# Altium PCB Morpheus_LED.PcbDoc (part 2 of 2)
Units mm, origin at the board's own origin, x right, y up, seen from the top; angles counter-clockwise.
Board outline 53.02 x 53.02 mm, 4 copper layers (Component Side, Ground Plane, Power Plane, Solder Side), stack 0.108 mm thick; 57 components, 33 nets, 170 pads, 69 vias.
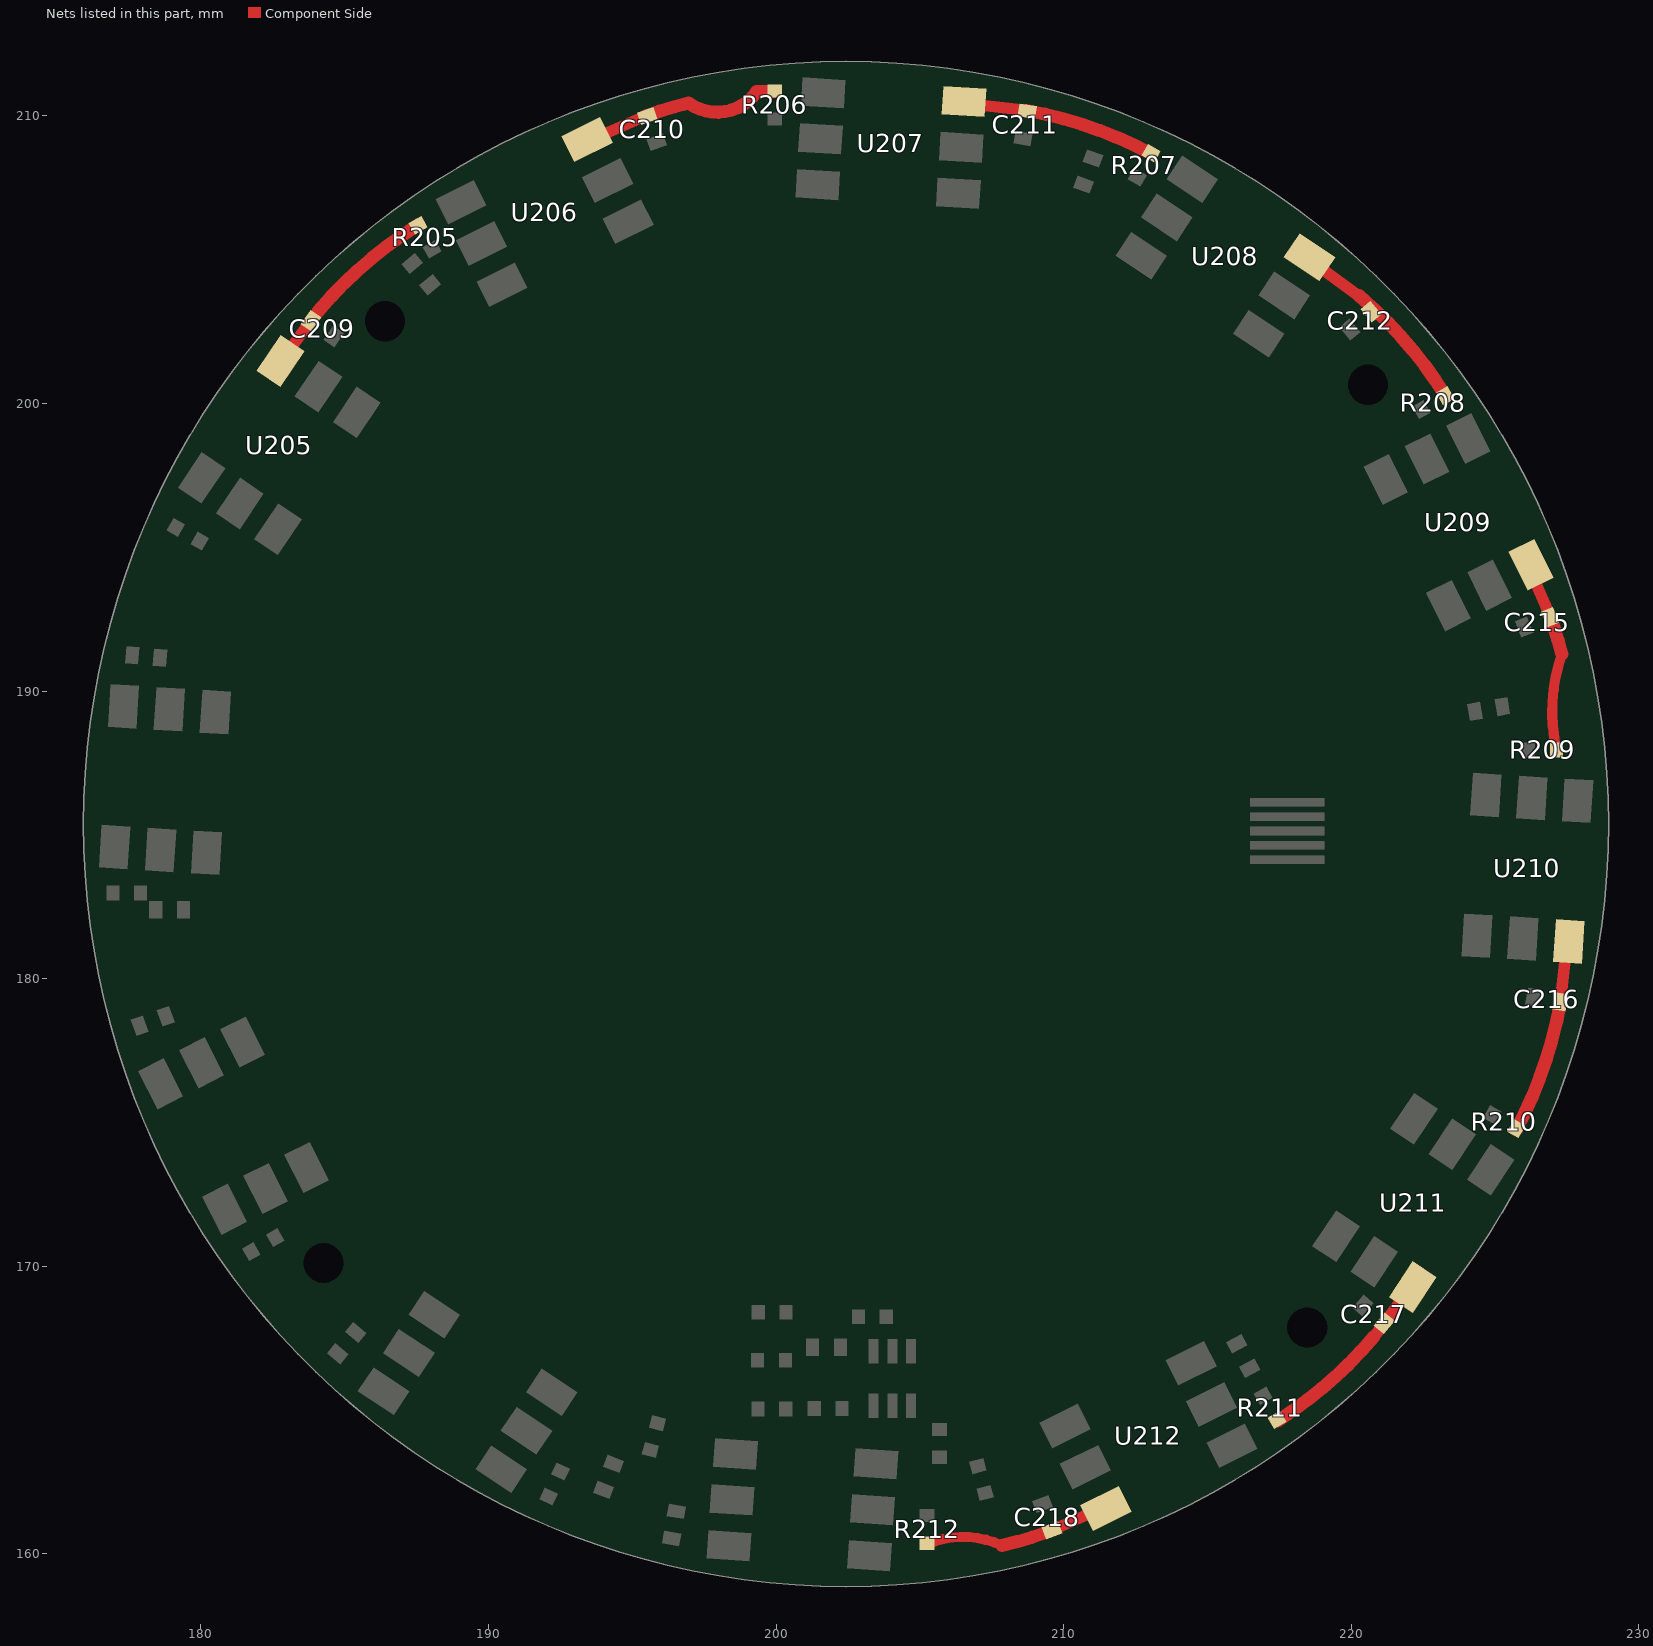
[diagram p4: the nets of this part, all layers, seen from the top]

## Via types
v1: diameter 0.6, hole 0.3, Component Side to Solder Side, tented both sides, 36 vias
v2: diameter 0.87, hole 0.411, Component Side to Solder Side, tented both sides, 28 vias
v3: diameter 0.6, hole 0.4, Component Side to Solder Side, tented both sides, 5 vias

## Nets (pads, with @x,y where several pads share a name; then routed paths per layer and width w, separated by ;. In a path a pad name is that pad's centre, name@x,y a point inside that pad or via, vN(x,y) a via of type N, cw(c..) or ccw(c..) an arc to the next point about the centre after c; other vN are vias at no path point) (continued)
VCC_205: C209.2 R205.1 U205.3 | length 6.8
  Component Side w0.4: U205.3@182.785,201.463 184.049,203.175
  Component Side w0.454: 184.068,203.196 cw(c195.471,193.515) R205.1@187.577,206.221
VCC_206: C210.2 R206.1 U206.3 | length 7
  Component Side w0.4: U206.3@193.456,209.121 C210.2@195.434,209.983
  Component Side w0.454: C210.2@195.461,209.993 cw(c200.496,195.907) 196.963,210.443 ccw(c197.953,211.815) 199.325,210.825 ; 199.324,210.846 cw(c199.701,195.892) R206.1@199.932,210.849
VCC_207: C211.2 R207.1 U207.3 | length 6.8
  Component Side w0.4: U207.3@206.529,210.437 C211.2@208.672,210.196
  Component Side w0.454: C211.2@208.7,210.19 cw(c206.018,195.474) R207.1@213.074,208.664
VCC_208: C212.2 R208.1 U208.3 | length 6.4
  Component Side w0.4: U208.3@218.879,204.756 220.323,203.69
  Component Side w0.454: 220.27,203.746 cw(c210.589,192.342) R208.1@223.295,200.237
VCC_209: C215.2 R209.1 U209.3 | length 6.1
  Component Side w0.354: R209.1@227.133,187.95 cw(c233.189,189.278) 227.324,191.287
  Component Side w0.4: U209.3@226.369,193.869 C215.2@226.905,192.64
  Component Side w0.454: C215.2@226.915,192.613 cw(c212.829,187.578) 227.321,191.286
VCC_210: C216.2 R210.1 U210.3 | length 7
  Component Side w0.4: C216.2@227.271,179.16 U210.3@227.531,181.466
  Component Side w0.454: R210.1@225.739,174.758 ccw(c212.549,181.814) C216.2@227.266,179.132
VCC_211: C217.2 R211.1 U211.3 | length 6.6
  Component Side w0.4: 220.815,167.577 U211.3@222.093,169.307
  Component Side w0.454: R211.1@217.437,164.625 ccw(c209.392,177.236) 220.796,167.555
VCC_212: C218.2 R212.1 U212.3 | length 6.5
  Component Side w0.354: R212.1@205.253,160.336 cw(c206.5,157.379) 207.854,160.289
  Component Side w0.4: C218.2@209.473,160.77 U212.3@211.444,161.63
  Component Side w0.454: 207.854,160.289 ccw(c204.41,174.847) C218.2@209.446,160.761
pads on no net: H101.1 H102.1 H103.1 H104.1 U201.4 U202.4 U203.4 U204.4 U205.4 U206.4 U207.4 U208.4 U209.4 U210.4 U211.4 U212.4

## Polygon pours and split planes (outlines as drawn)
GND on Ground Plane "Power Plane-No Net" (solid, pour order 2): 175.94,185.373 ccw(c202.44,185.373) 202.44,158.873 ccw(c202.44,185.373) 228.94,185.373 ccw(c202.44,185.373) 202.44,211.873 ccw(c202.44,185.373)
no net on Keep-Out Layer "Power Plane-No Net" (none): 175.94,185.373 ccw(c202.44,185.373) 202.44,158.873 ccw(c202.44,185.373) 228.94,185.373 ccw(c202.44,185.373) 202.44,211.873 ccw(c202.44,185.373)
5V on Power Plane "Power Plane-No Net" (solid, pour order 5): 175.94,185.373 ccw(c202.44,185.373) 202.44,158.873 ccw(c202.44,185.373) 228.94,185.373 ccw(c202.44,185.373) 202.44,211.873 ccw(c202.44,185.373)
no net on Multi-Layer (none): 193.195,166.644 ccw(c202.432,185.376) 197.181,165.161 ccw(c197.432,166.128) 198.432,166.128 198.432,175.119 cw(c200.432,175.119) 199.018,176.533 209.525,187.04 cw(c210.939,185.626) 210.939,187.626 215.74,187.626 cw(c215.74,187.126) 216.24,187.126 ccw(c216.74,187.126) 216.74,186.626 219.19,186.626 219.19,183.626 216.74,183.626 ccw(c216.74,183.126) 216.24,183.126 cw(c215.74,183.126) 215.74,182.626 215.741,182.626 213.011,182.626 213.01,182.626 ccw(c213.01,180.626) 211.596,182.04 207.018,177.462 ccw(c208.432,176.048) 206.432,176.048 206.432,166.128 ccw(c207.432,166.128) 207.684,165.161 ccw(c202.432,185.376) 211.67,166.644 ccw(c202.432,185.376) 214.036,168.01 ccw(c202.432,185.376) 218.549,198.661 219.431,199.466 ccw(c219.026,199.91) 219.478,200.305 ccw(c202.432,185.376) 218.784,201.062 ccw(c218.351,200.647) 217.946,201.09 217.062,200.283 ccw(c202.432,185.376) 214.036,202.742 ccw(c202.432,185.376) 211.67,204.108 ccw(c202.432,185.376) 193.195,204.108 ccw(c202.432,185.376) 190.829,202.742 ccw(c202.432,185.376) 181.761,182.388 180.588,182.155 ccw(c180.705,181.567) 180.114,181.463 ccw(c202.432,185.376) 180.314,180.456 ccw(c180.9,180.586) 181.017,179.998 182.19,180.231 ccw(c202.432,185.376)
no net on Flex-stiffener part "Mechanical 10-No Net" (solid): 175.95,185.423 ccw(c202.462,185.423) 202.462,158.911 ccw(c202.462,185.423) 228.974,185.423 ccw(c202.462,185.423) 202.462,211.935 ccw(c202.462,185.423)

## Keep-outs
Assemble drawing:
  circle w0.13: c202.44,185.373 r26.5
  circle w0.13: c184.274,170.124 r0.7
  circle w0.13: c218.474,167.874 r0.7
  circle w0.13: c186.408,202.854 r0.7
  lines w0.13: 217.43,171.587 217.835,171.587 218.638,171.587
Drill Drawing:
  circle w0.13: c184.274,170.124 r0.7
  circle w0.13: c218.474,167.874 r0.7
  circle w0.13: c186.408,202.854 r0.7

## Other copper
Component Side:
  text "Component side" at 341.804,234.529 h1.52
Ground Plane:
  pour cut-out: 197.176,165.139 ccw(c197.432,166.128) 198.454,166.128 198.454,169.066 201.669,169.066 ccw(c201.669,169.132) 201.735,169.132 ccw(c201.669,169.132) 201.727,169.162 201.727,175.575 ccw(c201.706,175.582) 201.728,175.582 cw(c203.706,175.582) 202.301,176.974 ccw(c202.288,176.992) 202.304,176.977 210.577,185.25 ccw(c210.567,185.269) 210.583,185.254 cw(c211.981,183.855) 211.981,185.833 ccw(c211.981,185.855) 211.989,185.835 214.683,185.835 214.683,185.788 ccw(c214.69,185.788) 214.697,185.788 214.697,185.835 214.702,185.835 ccw(c214.702,185.856) 214.724,185.856 ccw(c214.702,185.856) 214.702,185.878 214.697,185.878 214.697,187.604 215.739,187.604 ccw(c215.74,187.626) 215.74,187.604 cw(c215.74,187.126) 216.218,187.126 ccw(c216.24,187.126) 216.218,187.126 ccw(c216.74,187.126) 216.739,186.604 ccw(c216.741,187.125) 216.74,186.604 219.168,186.604 219.168,183.648 216.74,183.648 cw(c216.74,183.626) 216.741,183.648 216.74,183.648 ccw(c216.74,183.126) 216.218,183.126 ccw(c216.24,183.126) 216.218,183.125 ccw(c215.741,183.126) 216.218,183.126 216.218,183.125 cw(c215.74,183.126) 215.741,182.648 cw(c215.74,183.126) 215.74,182.648 215.741,182.648 cw(c215.741,182.626) 215.741,182.648 214.697,182.647 214.697,184.505 ccw(c214.69,184.526) 214.712,184.526 ccw(c214.69,184.526) 214.697,184.546 214.697,184.573 ccw(c214.69,184.573) 214.683,184.573 214.683,184.547 212.638,184.547 ccw(c212.629,184.528) 212.629,184.549 ccw(c212.629,182.528) 211.239,183.996 ccw(c211.245,183.975) 211.23,183.991 203.807,176.567 ccw(c203.813,176.546) 203.797,176.562 ccw(c205.227,175.132) 203.205,175.132 ccw(c203.227,175.132) 203.206,175.128 203.206,169.172 ccw(c203.254,169.128) 203.254,169.063 206.411,169.063 206.411,166.128 ccw(c207.432,166.128) 207.689,165.139 ccw(c202.432,185.376) 211.68,166.624 ccw(c202.432,185.376) 214.048,167.991 ccw(c202.432,185.376) 223.341,185.376 ccw(c202.432,185.376) 218.579,198.659 219.445,199.45 ccw(c219.431,199.466) 219.446,199.45 ccw(c219.026,199.91) 219.648,199.91 ccw(c219.026,199.91) 219.494,200.319 ccw(c202.432,185.376) 218.799,201.077 ccw(c218.351,200.647) 217.932,201.107 ccw(c218.35,200.646) 217.931,201.106 ccw(c217.946,201.09) 217.931,201.106 cw(c217.946,201.09) 217.932,201.107 217.931,201.106 217.062,200.313 ccw(c202.432,185.376) 214.048,202.76 ccw(c202.432,185.376) 211.68,204.128 ccw(c202.432,185.376) 193.185,204.128 ccw(c202.432,185.376) 190.817,202.76 ccw(c190.829,202.742) 190.817,202.76 ccw(c190.829,202.742) 190.817,202.76 ccw(c202.432,185.376) 181.736,182.406 180.584,182.177 ccw(c180.705,181.567) 180.093,181.459 ccw(c180.114,181.463) 180.093,181.459 ccw(c202.432,185.376) 180.293,180.451 ccw(c180.314,180.456) 180.293,180.451 ccw(c180.9,180.586) 181.021,179.976 ccw(c180.899,180.586) 181.021,179.976 182.174,180.205 ccw(c202.432,185.376) 193.185,166.624 ccw(c202.432,185.376)
  text "Ground plane" at 341.746,224.569 h1.52
Power Plane:
  pour cut-out: 197.176,165.139 ccw(c197.432,166.128) 198.454,166.128 198.454,169.066 201.744,169.066 ccw(c201.744,169.132) 201.81,169.132 ccw(c201.744,169.132) 201.744,169.197 201.727,169.197 201.727,175.575 ccw(c201.706,175.582) 201.728,175.582 cw(c203.706,175.582) 202.301,176.974 ccw(c202.288,176.992) 202.304,176.977 210.577,185.25 ccw(c210.567,185.269) 210.583,185.254 cw(c211.981,183.855) 211.981,185.833 ccw(c211.981,185.855) 211.989,185.835 214.683,185.835 214.683,185.788 ccw(c214.69,185.788) 214.697,185.788 214.697,185.835 214.702,185.835 ccw(c214.702,185.856) 214.724,185.856 ccw(c214.702,185.856) 214.702,185.878 214.697,185.878 214.697,187.604 215.739,187.604 ccw(c215.74,187.626) 215.74,187.604 cw(c215.74,187.126) 216.218,187.126 ccw(c216.24,187.126) 216.218,187.126 ccw(c216.74,187.126) 216.739,186.604 ccw(c216.74,187.126) 216.74,186.604 219.168,186.604 219.168,183.648 216.74,183.648 cw(c216.74,183.626) 216.741,183.648 216.74,183.648 ccw(c216.74,183.126) 216.218,183.126 ccw(c216.24,183.126) 216.218,183.125 ccw(c215.74,183.126) 216.218,183.126 216.218,183.125 cw(c215.74,183.126) 215.741,182.648 cw(c215.74,183.126) 215.74,182.648 215.741,182.648 cw(c215.741,182.626) 215.741,182.648 214.697,182.647 214.697,184.505 ccw(c214.69,184.526) 214.712,184.526 ccw(c214.69,184.526) 214.697,184.546 214.697,184.573 ccw(c214.69,184.573) 214.683,184.573 214.683,184.547 212.638,184.547 ccw(c212.629,184.528) 212.629,184.549 ccw(c212.629,182.528) 211.239,183.996 ccw(c211.245,183.975) 211.23,183.991 203.807,176.567 ccw(c203.813,176.546) 203.797,176.562 ccw(c205.227,175.132) 203.205,175.132 ccw(c203.227,175.132) 203.206,175.128 203.206,169.194 203.19,169.194 ccw(c203.19,169.128) 203.19,169.063 206.411,169.063 206.411,166.128 ccw(c207.432,166.128) 207.689,165.139 ccw(c202.432,185.376) 211.68,166.624 ccw(c202.432,185.376) 214.048,167.991 ccw(c202.432,185.376) 223.341,185.376 ccw(c202.432,185.376) 218.579,198.659 219.445,199.45 ccw(c219.431,199.466) 219.446,199.45 ccw(c219.026,199.91) 219.648,199.91 ccw(c219.026,199.91) 219.494,200.319 ccw(c202.432,185.376) 218.799,201.077 ccw(c218.351,200.647) 217.932,201.107 ccw(c218.351,200.647) 217.931,201.106 ccw(c217.946,201.09) 217.931,201.106 cw(c217.946,201.09) 217.932,201.107 217.931,201.106 217.062,200.313 ccw(c202.432,185.376) 214.048,202.76 ccw(c202.432,185.376) 211.68,204.128 ccw(c202.432,185.376) 193.185,204.128 ccw(c202.432,185.376) 190.817,202.76 ccw(c190.829,202.742) 190.817,202.76 ccw(c190.829,202.742) 190.817,202.76 ccw(c202.432,185.376) 181.736,182.406 180.584,182.177 ccw(c180.705,181.567) 180.093,181.459 ccw(c180.114,181.463) 180.093,181.459 ccw(c202.432,185.376) 180.293,180.451 ccw(c180.314,180.456) 180.293,180.451 ccw(c180.9,180.586) 181.021,179.976 ccw(c180.9,180.586) 181.021,179.976 182.174,180.205 ccw(c202.432,185.376) 193.185,166.624 ccw(c202.432,185.376)
  text "Power plane" at 341.746,214.552 h1.52
Solder Side:
  text "Solder side" at 341.804,204.134 h1.52

## Silkscreen, mask and mechanical layers (free items; w line width, h text height)
Top Overlay:
  text "GD" at 215.003,186.697 h0.52
  text "DI" at 215.014,185.783 h0.52
  text "5v" at 214.998,184.885 h0.52
  text "DO" at 214.976,183.955 h0.52
  text "GD" at 214.993,183.02 h0.52
Assemble drawing:
  drawing of 1966 lines, arcs and shapes, not listed
  text "5" at 286.506,380.531 h2.38
  text "6" at 236.214,380.517 h2.38
  text "4" at 336.941,380.49 h2.38
  text "2" at 436.933,380.504 h2.38
  text "8" at 134.878,380.384 h2.38
  text "3" at 386.939,380.334 h2.38
  text "1" at 488.403,380.348 h2.38
  text "7" at 186.742,380.312 h2.38
  text "Assembly Notes" at 142.599,366.46 h3.52
  text "1. LED IC Pin #1 is noted as the triangular edge" at 142.891,362.75 h1.52
  text "2. IMPORTANT! Please follow the LOW temperature reflow process as" at 142.891,358.734 h1.52
  text "specified by World-Semi Documentation" at 147.071,354.571 h1.52
  text "https://www.dropbox.com/s/wnyal9r8ml1h7r3/WS2812S%28B%29%20Using%20Instructions.pdf?dl=0" at 147.071,350.597 h1.52
  text "D" at 515.427,346.335 h2.38
  text "Contact Ben Peng for more detail- ben@sayhello.com" at 147.13,346.13 h1.52
  text "D" at 107.434,345.486 h2.38
  text "C" at 107.401,280.787 h2.38
  text "C" at 514.916,280.653 h2.38
  text "B" at 107.378,216.852 h2.38
  text "B" at 515.939,216.493 h2.38
  text "*" at 197.114,210.454 h2.52
  text "*" at 227.825,188.575 h2.52
  text "*" at 175.437,179.921 h2.52
  text "DATE" at 423.372,163.342 h1
  text "DRAFTER" at 401.122,163.042 h1
  text "METRIC" at 374.997,162.467 h1.78
  text "DIMENSIONS ARE IN MILLIMETERS" at 365.826,159.441 h1
  text "*" at 205.975,158.75 h2.52
  text "TOLERANCES:" at 365.826,156.971 h1
  text "DESIGNER" at 400.972,156.392 h1
  text "DATE" at 423.522,156.242 h1
  text "0.10" at 387.076,154.271 h1.5
  text "0 > - < 2" at 369.658,154.164 h1.5
  text "05/01/15" at 423.59,152.884 h1.52
  text "Ben" at 400.822,152.642 h2.54
  text "2 > - < 10" at 369.586,151.358 h1.5
  text "0.10" at 387.076,151.358 h1.5
  text "TITLE:" at 444.347,151.217 h2.54
  text "A" at 107.368,149.862 h2.38
  text "10 > - < 50" at 368.478,148.334 h1.5
  text "0.10" at 387.076,148.334 h1.5
  text "PROPRIETARY AND CONFIDENTIAL" at 401.072,147.492 h1.5
  text "50 > - < 100" at 368.551,145.362 h1.5
  text "0.15" at 387.076,145.362 h1.5
  text "Morpheus LED Board" at 444.447,145.017 h2.54
  text "THE INFORMATION CONTAINED IN" at 401.205,143.104 h1.5
  text "100 > - < 200" at 367.443,142.284 h1.5
  text "0.20" at 387.076,142.284 h1.5
  text "THIS DRAWING IS THE SOLE" at 401.205,140.354 h1.5
  text "200 > -" at 367.443,138.84 h1.5
  text "0.20" at 387.076,138.84 h1.5
  text "PROPERTY OF HELLO INC." at 401.205,137.604 h1.5
  text "ANGLES" at 369.648,134.276 h1.5
  text "1.00" at 387.076,134.253 h1.5
  text "ANY REPRODUCTION IN PART OR" at 401.205,132.104 h1.5
  text "DWG.  NO." at 454.722,130.042 h2.54
  text "SIZE" at 442.922,129.842 h2.54
  text "REV" at 500.672,129.742 h2.54
  text "AS A WHOLEWITHOUT THE" at 401.205,129.354 h1.5
  text "WRITTEN PERMISSION OF HELLO" at 401.205,126.604 h1.5
  text "905-00006-B" at 457.197,124.443 h2
  text "INC IS PROHIBITED." at 401.205,123.854 h1.5
  text "B" at 444.747,122.217 h6.35
  text "SCALE: 1:1" at 443.422,116.417 h2.04
  text "SHEET 1 OF 1" at 488.672,116.417 h2.04
  text "WEIGHT:" at 464.672,116.217 h2.04
  text "4" at 334.789,110.885 h2.38
  text "8" at 134.977,110.688 h2.38
  text "7" at 186.556,110.696 h2.38
  text "6" at 236.376,110.706 h2.38
  text "2" at 435.346,110.675 h2.38
  text "3" at 385.218,110.654 h2.38
  text "5" at 286.319,110.628 h2.38
  text "1" at 487.569,110.394 h2.38
Flex only part:
  drawing of 250 lines, arcs and shapes, not listed
  text "Flex only layer" at 173.376,150.931 h5.52
Mechanical 10:
  drawing of 152 lines, arcs and shapes, not listed
  text "4X" at 178.451,222.013 h3.18 r90
  text "R2" at 178.451,215.915 h3.18 r90
  text "2.25" at 245.554,202.994 h3.18 r90
  text "1.25" at 261.372,202.994 h3.18 r90
  text "16.25" at 161.732,200.574 h3.18 r90
  text "3" at 255.372,172.106 h3.18 r90
  text "5" at 240.176,170.99 h3.18 r90
  text "STIFFENER" at 233.331,164.757 h3.18 r90
  text "45" at 188.463,158.343 h3.18 r90
  text "12.26" at 185.597,142.514 h3.18 r90
  text "13.81" at 190.607,139.137 h3.18 r90
  text "16.76" at 196.035,136.514 h3.18 r90
Mechanical 13:
  lines w0.13: 170.011,182.626 232.741,182.626 ; 170.939,187.626 232.74,187.626 ; 198.432,154.128 198.432,213.119 ; 206.432,145.128 206.432,213.048
Flex-stiffener part:
  drawing of 256 lines, arcs and shapes, not listed
  text "Flex-Stiffener layer" at 225.479,146.709 h5.52
Drill Drawing:
  drawing of 2340 lines, arcs and shapes, not listed
  text "5" at 286.506,380.531 h2.38
  text "6" at 236.214,380.517 h2.38
  text "4" at 336.941,380.49 h2.38
  text "2" at 436.933,380.504 h2.38
  text "8" at 134.878,380.384 h2.38
  text "3" at 386.939,380.334 h2.38
  text "1" at 488.403,380.348 h2.38
  text "7" at 186.742,380.312 h2.38
  text "Fabrication Notes" at 142.71,366.572 h3.52
  text "1. Material: Flex-Stiffener. (See Page Flex Stiffener)" at 142.699,363.185 h1.52
  text "Flex-only. (See Page Flex only)" at 160.993,359.95 h1.52
  text "2. Number of electrical layers: 4" at 142.489,355.85 h1.52
  text "3. Trace / Space minimum: 5mil (all layers)" at 142.516,352.138 h1.52
  text "4. Thickness: 0.3 mm +/- 0.1mm (finished), see bottom right layer chart" at 142.516,348.453 h1.52
  text "D" at 515.427,346.335 h2.38
  text "D" at 107.434,345.486 h2.38
  text "5. Finish:  ENIG plating on exposed copper" at 142.543,344.42 h1.52
  text "6. Soldermask: per IPC-SM-840, color black, registration within +/- 76um of circuit layer" at 142.569,340.922 h1.52
  text "7. Silkscreen: printed silkscreen on top and bottom layers, color white.  Clip on pads." at 142.569,336.676 h1.52
  text "8. All vias are tented" at 142.543,332.831 h1.52
  text "9. Board must be lead free process compatible." at 142.569,329.093 h1.52
  text "10. mousebites shall be no larger than 0.05 mm" at 141.261,325.274 h1.52
  text "11. All Test/QA/QC markings, if present, are to be made on back side of PCB" at 141.528,321.028 h1.52
  text "12. All Dimensions are after plating/finishing" at 141.288,317.076 h1.52
  text "13. All components must be placed within +/- 0.10mm" at 141.261,313.231 h1.52
  text "Layer" at 144.328,299.294 h1.52
  text "Name" at 154.739,299.294 h1.52
  text "Material" at 192.574,299.294 h1.52
  text "Thickness" at 214.412,299.294 h1.52
  text "Constant" at 230.918,299.294 h1.52
  text "Flex-stiffener Layer Stack" at 245.393,299.294 h1.52
  text "Flex Layer Stack" at 286.275,299.294 h1.52
  text "Symbol" at 320.805,298.868 h1.83
  text "Hit Count" at 333.654,298.868 h1.83
  text "Finished Hole Size" at 351.379,298.868 h1.83
  text "Hole Type" at 385.557,298.868 h1.83
  text "Plated" at 404.195,298.868 h1.83
  text "1" at 144.328,296.246 h1.52
  text "Top Overlay 1" at 154.739,296.246 h1.52
  text "36" at 333.654,295.058 h1.52
  text "0.300mm (11.81mil)" at 351.379,295.058 h1.52
  text "Round" at 385.557,295.058 h1.52
  text "PTH" at 404.195,295.058 h1.52
  text "2" at 144.328,293.198 h1.52
  text "Top Overlay" at 154.739,293.198 h1.52
  text "5" at 333.654,291.248 h1.52
  text "0.400mm (15.75mil)" at 351.379,291.248 h1.52
  text "Round" at 385.557,291.248 h1.52
  text "PTH" at 404.195,291.248 h1.52
  text "3" at 144.328,290.15 h1.52
  text "Top Solder" at 154.739,290.15 h1.52
  text "Solder Resist" at 192.574,290.15 h1.52
  text "0.012mm" at 214.412,290.15 h1.52
  text "3.5" at 230.918,290.15 h1.52
  text "28" at 333.654,287.438 h1.52
  text "0.411mm (16.18mil)" at 351.379,287.438 h1.52
  text "Round" at 385.557,287.438 h1.52
  text "PTH" at 404.195,287.438 h1.52
  text "4" at 144.328,287.102 h1.52
  text "Component Side" at 154.739,287.102 h1.52
  text "Copper" at 192.574,287.102 h1.52
  text "0.018mm" at 214.412,287.102 h1.52
  text "5" at 144.328,284.054 h1.52
  text "Flexible Dielectric 1" at 154.739,284.054 h1.52
  text "Polymide" at 192.574,284.054 h1.52
  text "0.012mm" at 214.412,284.054 h1.52
  text "3.5" at 230.918,284.054 h1.52
  text "4" at 333.654,283.628 h1.52
  text "1.400mm (55.12mil)" at 351.379,283.628 h1.52
  text "Round" at 385.557,283.628 h1.52
  text "NPTH" at 404.195,283.628 h1.52
  text "6" at 144.328,281.006 h1.52
  text "Ground Plane" at 154.739,281.006 h1.52
  text "Copper" at 192.574,281.006 h1.52
  text "0.018mm" at 214.412,281.006 h1.52
  text "C" at 107.401,280.787 h2.38
  text "C" at 514.916,280.653 h2.38
  text "73 Total" at 333.654,279.818 h1.52
  text "7" at 144.328,277.958 h1.52
  text "Flexible core Dielectric" at 154.739,277.958 h1.52
  text "Polymide" at 192.574,277.958 h1.52
  text "0.012mm" at 214.412,277.958 h1.52
  text "3.5" at 230.918,277.958 h1.52
  text "8" at 144.328,274.91 h1.52
  text "Power Plane" at 154.739,274.91 h1.52
  text "Copper" at 192.574,274.91 h1.52
  text "0.018mm" at 214.412,274.91 h1.52
  text "9" at 144.328,271.862 h1.52
  text "Flexible Dielectric 2" at 154.739,271.862 h1.52
  text "Polymide" at 192.574,271.862 h1.52
  text "0.012mm" at 214.412,271.862 h1.52
  text "3.5" at 230.918,271.862 h1.52
  text "10" at 144.328,268.814 h1.52
  text "Solder Side" at 154.739,268.814 h1.52
  text "Copper" at 192.574,268.814 h1.52
  text "0.018mm" at 214.412,268.814 h1.52
  text "11" at 144.328,265.766 h1.52
  text "Bottom Solder" at 154.739,265.766 h1.52
  text "Solder Resist" at 192.574,265.766 h1.52
  text "0.012mm" at 214.412,265.766 h1.52
  text "3.5" at 230.918,265.766 h1.52
  text "12" at 144.328,262.718 h1.52
  text "Bottom Overlay" at 154.739,262.718 h1.52
  text "13" at 144.328,259.67 h1.52
  text "Stiffener overlay" at 154.739,259.67 h1.52
  text "Flex-Only" at 392.714,255.492 h3.52
  text "Flex-Stiffener" at 339.975,254.997 h3.52
  text "Top overlay (.012mm)" at 341.804,245.519 h1.52
  text "41.75" at 187.037,242.671 h2.17
  text "+/-0.05" at 200.618,242.671 h2.17
  text "Top solder  (.012mm)" at 394.664,240.082 h1.52
  text "Top solder" at 341.755,239.948 h1.52
  text "Component side (0.018mm)" at 394.712,234.664 h1.52
  text "Component side" at 341.804,234.529 h1.52
  text "Dielectric (.012mm)" at 394.712,229.684 h1.52
  text "Dielectric" at 341.804,229.549 h1.52
  text "16.04" at 156.814,229.423 h2.17
  text "+/-0.03" at 167.371,229.423 h2.17
  text "18.18" at 228.398,229.423 h2.17
  text "+/-0.03" at 238.954,229.423 h2.17
  text "Ground plane (0.018mm)" at 394.655,224.704 h1.52
  text "Ground plane" at 341.746,224.569 h1.52
  text "Dielectric (.012mm)" at 394.655,219.667 h1.52
  text "Dielectric" at 341.746,219.532 h1.52
  text "15.25" at 245.293,219.015 h2.17
  text "+/-0.03" at 255.85,219.015 h2.17
  text "0.3mm" at 308.018,217.156 h3.52
  text "B" at 107.378,216.852 h2.38
  text "B" at 515.939,216.493 h2.38
  text "0.132mm" at 452.778,214.879 h3.52
  text "Power plane (0.018mm)" at 394.655,214.687 h1.52
  text "Power plane" at 341.746,214.552 h1.52
  text "17.48" at 135.169,212.868 h2.17
  text "+/-0.03" at 145.726,212.868 h2.17
  text "*" at 197.114,210.454 h2.52
  text "Dielectric (.012mm)" at 394.712,209.535 h1.52
  text "Dielectric" at 341.804,209.4 h1.52
  text "Solder side (0.018mm)" at 394.712,204.269 h1.52
  text "Solder side" at 341.804,204.134 h1.52
  text "Bottom solder (.012mm)" at 394.68,199.013 h1.52
  text "Bottom solder" at 341.771,198.878 h1.52
  text "* = mousebite locations" at 123.447,195.536 h1.52
  text "Stiffener layer (0.156mm)" at 341.83,193.501 h1.52
  text "*" at 227.825,188.575 h2.52
  text "*" at 175.437,179.921 h2.52
  text "15.25" at 126.477,164.918 h2.17
  text "+/-0.03" at 137.034,164.918 h2.17
  text "DATE" at 423.372,163.342 h1
  text "DRAFTER" at 401.122,163.042 h1
  text "METRIC" at 374.997,162.467 h1.78
  text "DIMENSIONS ARE IN MILLIMETERS" at 365.826,159.441 h1
  text "*" at 205.975,158.75 h2.52
  text "TOLERANCES:" at 365.826,156.971 h1
  text "DESIGNER" at 400.972,156.392 h1
  text "DATE" at 423.522,156.242 h1
  text "0.10" at 387.076,154.271 h1.5
  text "0 > - < 2" at 369.658,154.164 h1.5
  text "17.50" at 245.293,154.121 h2.17
  text "+/-0.03" at 255.85,154.121 h2.17
  text "05/01/15" at 423.59,152.884 h1.52
  text "Ben" at 400.822,152.642 h2.54
  text "2 > - < 10" at 369.586,151.358 h1.5
  text "0.10" at 387.076,151.358 h1.5
  text "TITLE:" at 444.347,151.217 h2.54
  text "A" at 107.368,149.862 h2.38
  text "18.17" at 146.345,148.938 h2.17
  text "+/-0.03" at 156.902,148.938 h2.17
  text "16.03" at 221.916,148.938 h2.17
  text "+/-0.03" at 232.473,148.938 h2.17
  text "10 > - < 50" at 368.478,148.334 h1.5
  text "0.10" at 387.076,148.334 h1.5
  text "PROPRIETARY AND CONFIDENTIAL" at 401.072,147.492 h1.5
  text "50 > - < 100" at 368.551,145.362 h1.5
  text "0.15" at 387.076,145.362 h1.5
  text "Morpheus LED Board" at 444.447,145.017 h2.54
  text "THE INFORMATION CONTAINED IN" at 401.205,143.104 h1.5
  text "100 > - < 200" at 367.443,142.284 h1.5
  text "0.20" at 387.076,142.284 h1.5
  text "THIS DRAWING IS THE SOLE" at 401.205,140.354 h1.5
  text "200 > -" at 367.443,138.84 h1.5
  text "0.20" at 387.076,138.84 h1.5
  text "PROPERTY OF HELLO INC." at 401.205,137.604 h1.5
  text "ANGLES" at 369.648,134.276 h1.5
  text "1.00" at 387.076,134.253 h1.5
  text "ANY REPRODUCTION IN PART OR" at 401.205,132.104 h1.5
  text "53" at 188.619,130.584 h2.17
  text "+/-0.05" at 196.335,130.584 h2.17
  text "DWG.  NO." at 454.722,130.042 h2.54
  text "SIZE" at 442.922,129.842 h2.54
  text "REV" at 500.672,129.742 h2.54
  text "AS A WHOLEWITHOUT THE" at 401.205,129.354 h1.5
  text "WRITTEN PERMISSION OF HELLO" at 401.205,126.604 h1.5
  text "201-00006-B" at 457.197,124.443 h2
  text "INC IS PROHIBITED." at 401.205,123.854 h1.5
  text "B" at 444.747,122.217 h6.35
  text "SCALE: 1:1" at 443.422,116.417 h2.04
  text "SHEET 1 OF 1" at 488.672,116.417 h2.04
  text "WEIGHT:" at 464.672,116.217 h2.04
  text "4" at 334.789,110.885 h2.38
  text "8" at 134.977,110.688 h2.38
  text "7" at 186.556,110.696 h2.38
  text "6" at 236.376,110.706 h2.38
  text "2" at 435.346,110.675 h2.38
  text "3" at 385.218,110.654 h2.38
  text "5" at 286.319,110.628 h2.38
  text "1" at 487.569,110.394 h2.38